# Altium PCB VT18-MODEL-B.PcbDoc (part 2 of 3)
Units mil, origin at the board's own origin, x right, y up, seen from the top; angles counter-clockwise.
Board outline 4724.41 x 4645.67 mil, 4 copper layers (Top Layer, Internal Plane 1, Internal Plane 2, Bottom Layer), stack 30.635 mil thick; 246 components, 149 nets, 926 pads, 600 vias.
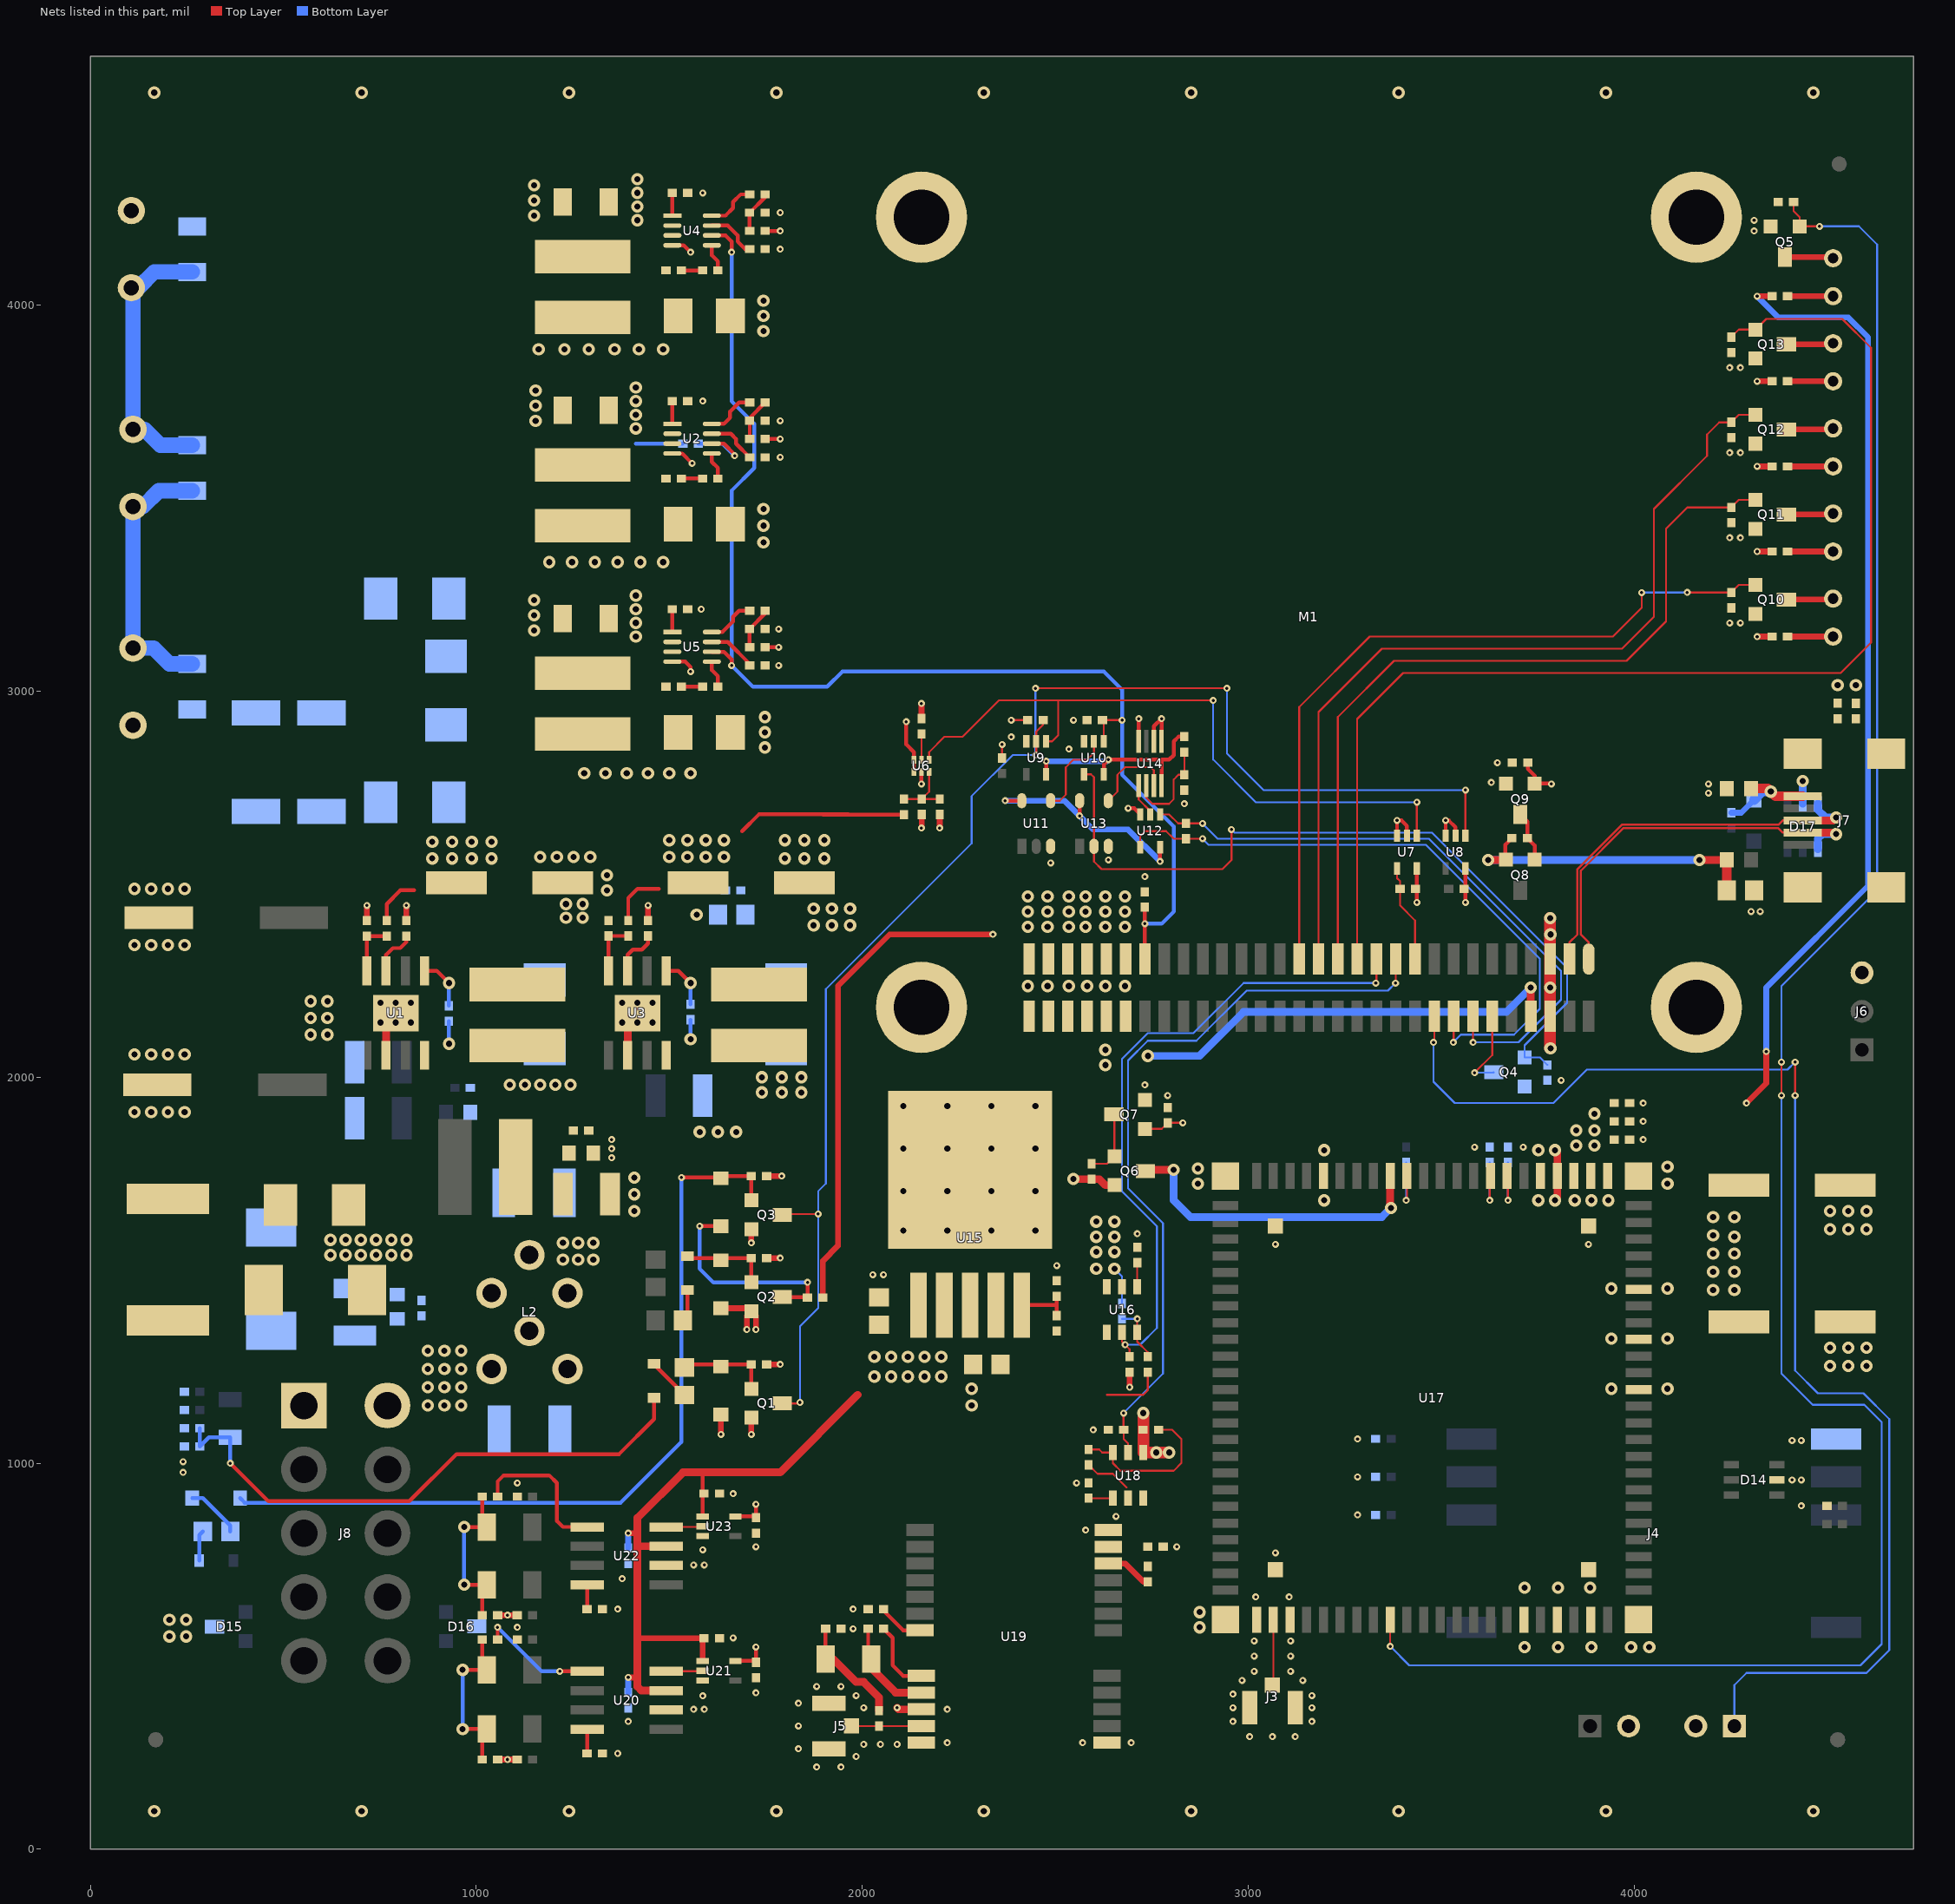
[diagram p4: the nets of this part, all layers, seen from the top]

## Via types
v1: diameter 32, hole 16, Top Layer to Bottom Layer, tented both sides, 365 vias
v2: diameter 18, hole 8, Top Layer to Bottom Layer, tented both sides, 235 vias

## Nets (pads, with @x,y where several pads share a name; then routed paths per layer and width w, separated by ;. In a path a pad name is that pad's centre, name@x,y a point inside that pad or via, vN(x,y) a via of type N, cw(c..) or ccw(c..) an arc to the next point about the centre after c; other vN are vias at no path point) (continued)
CORE-PWR: C16.1 L3.2 M1.57 M1.58 M1.59 M1.60 R11.1 R31.1 R35.1 R36.1 R42.1 U6.1 U6.6 U9.5 U10.5 U11.5 U12.5 U13.5 U14.8 | length 2670.3
  Top Layer w5: R36.1@2362.2,2827.21 v2(2362.2,2862.2) ; v2(2385.83,2925.2) R31.1@2428.69,2925.2
  Top Layer w10: R11.1@1748.47,3653.54 v2(1787.4,3653.54) ; v2(2114.17,2921.26) 2114.17,2862.2 2133.86,2842.52 U6.6@2133.86,2822.83 U6.1@2133.86,2791.34 ; v2(2370.08,2716.54) U11.5@2413.39,2716.54 ; U9.5@2476.38,2785.08 v2(2476.38,2818.9) ; v2(2562.99,2677.17) U13.5@2562.99,2716.54 ; U10.5@2625.98,2785.08 2625.98,2811.02 v2(2637.8,2822.83) 2775.59,2822.83 ; v2(2771.65,2559.06) U12.5@2771.65,2596.1 ; U14.8@2775.59,2755.91 2775.59,2822.83 ; R42.1@2834.65,2882.33 2819.34,2882.33 2807.09,2870.08 2807.09,2834.65 2795.28,2822.83 2775.59,2822.83
  Top Layer w15: R35.1@1898.08,1429.13 1898.08,1524.06 1937.01,1562.99 1937.01,2236.22 2070.87,2370.08 v2(2338.58,2370.08)
  Bottom Layer w15: v2(2370.08,2716.54) 2523.62,2716.54 v2(2562.99,2677.17) 2598.43,2641.73 2688.98,2641.73 v2(2771.65,2559.06) ; v2(2476.38,2818.9) 2633.86,2818.9 v2(2637.8,2822.83)
  other v1: 2429.13,2236.22 2480.31,2236.22 2429.13,2389.76 2480.31,2389.76 2429.13,2429.13 2480.31,2429.13 2429.13,2468.5 2480.31,2468.5 1188.98,3334.65 1248.03,3334.65 1307.09,3334.65 1366.14,3334.65 1425.2,3334.65 1484.25,3334.65
GND: C3.2 C4.2 C6.2 C7.2 C8.2 C9.2 C10.2 C11.2 C13.1 C15.2 C16.2 C18.1 C19.2 C21.1 C22.2 C25.2 C26.1 C27.1 C28.2 C29.1 C30.2 C31.1 C32.1 C34.1 C35.2 C36.2 C37.1 C38.1 C39.2 C40.2 C41.2 C42.2 C43.2 C48.2 C50.1 C51.1 C52.2 C53.2 C54.2 C55.2 C56.2 C57.2 C58.2 C59.2 C60.2 C62.2 C63.2 C64.1 C65.2 C66.2 C67.2 C68.2 C69.2 C70.1 C71.2 C72.2 C73.2 C74.2 C75.2 C76.1 C78.1 D6.1 D8.1 D10.1 D12.1 D14.2 D15.3 D16.3 D17.2 J1.2 J2.2 J3.2 J3.3 J4.4 J5.2 J5.3 J6.3 L2.4 L2.5 L2.6 L10.1 M1.5 M1.6 M1.49 M1.50 M1.51 M1.52 M1.MT1 M1.MT2 M1.MT3 M1.MT4 Q1.3 Q2.3 Q3.3 Q4.3 Q5.3 Q7.3 Q9.3 Q10.3 Q11.3 Q12.3 Q13.3 R2.1 R3.2 R12.2 R13.2 R15.2 R16.2 R21.2 R22.2 R23.2 R28.2 R29.2 R34.2 R39.2 R40.2 R43.2 R46.1 R48.2 R49.1 R50.1 R52.1 R53.2 R54.2 R58.1 R59.1 R62.1 R67.2 R71.2 R73.1 R74.2 R79.1 R80.1 R81.1 R82.1 R83.2 U1.6 U1.9 U2.4 U3.6 U3.9 U4.4 U5.4 U6.2 U7.2 U7.3 U8.2 U8.3 U9.3 U10.3 U11.3 U12.3 U13.3 U14.1 U14.2 U14.4 U15. U15.3 U17.1 U17.14 U17.17 U17.20 U17.26 U17.30 U17.31 U17.44 U17.49 U17.74 U17.75 U17.77 U17.91 U17.93 U17.95 U17.97 U17.98 U17.99 U17.100 U19.10 U19.12 U19.13 U19.24 U20.2 U21.3 U22.2 U23.3 | length 2215.5
  Top Layer w10: U5.4@1507.87,3076.77 1541.34,3076.77 1555.12,3062.99 v2(1555.12,3051.18) ; U2.4@1507.87,3616.14 1533.46,3616.14 v2(1559.06,3590.55) ; U4.4@1507.87,4155.51 1537.4,4155.51 v2(1555.12,4137.8) ; v2(2153.54,2759.84) U6.2@2153.54,2791.34 ; v2(2688.98,2696.85) 2704.71,2696.85 U12.3@2720.46,2681.1 ; U14.4@2716.54,2870.08 v2(2716.54,2929.13) ; U14.2@2755.91,2870.08 2755.91,2909.45 v2(2775.59,2929.13) U14.1@2775.59,2870.08 ; U7.3@3385.81,2625.98 v2(3385.83,2665.35) 3397.65,2665.34 3411.41,2651.58 U7.2@3411.41,2625.98 ; U8.3@3511.8,2625.98 v2(3511.8,2665.34) 3519.7,2665.34 3537.39,2647.65 U8.2@3537.39,2625.98
  Top Layer w15: R3.2@716.54,2405.7 v2(716.54,2444.88) ; R13.2@818.9,2405.7 v2(818.9,2444.88) ; C69.2@1055.31,232.28 C64.1@1105.86,232.28 ; C75.2@1055.31,606.3 C70.1@1105.86,606.3 ; R21.2@1444.88,2406.14 v2(1444.88,2444.88) ; v2(1633.86,1074.8) D10.1@1633.86,1125.98 ; D12.1@1633.86,1401.57 Q2.3@1704.53,1401.57 ; v2(1700.79,1346.46) 1700.79,1381.69 Q2.3@1712.6,1393.5 1724.41,1381.69 v2(1724.41,1346.46) ; v2(1712.6,1074.8) Q1.3@1712.6,1117.91 ; v2(1712.6,1570.87) Q3.3@1712.6,1606.1 ; R34.2@1752.16,1255.91 v2(1787.4,1255.91) ; R39.2@1752.16,1531.5 v2(1787.4,1531.5) ; R83.2@1752.16,1744.09 v2(1791.34,1744.09) ; v2(2153.54,2645.67) 2154.39,2646.51 R29.2@2154.39,2680.91 ; C36.2@2153.54,2929.32 v2(2153.54,2968.5) ; v2(2200.79,2645.67) C39.2@2200.79,2680.91 ; v2(2692.91,1196.85) R50.1@2692.91,1235.78
  Top Layer w20: U1.6@766.14,2056.69 766.14,2140.94 U1.9@791.34,2166.14 ; U3.6@1392.13,2056.69 U3.9@1392.13,2140.94 ; v2(2090.55,366.14) 2094.49,362.2 U19.10@2153.54,362.2 ; v1(3751.97,1681.1) v1@3755.91,1681.1 ; v1(3751.97,1811.02) v1@3755.91,1811.02 ; v1(3795.28,1681.1) 3801.18,1687.01 U17.30@3801.18,1744.09 3801.18,1805.12 v1(3795.28,1811.02)
  Top Layer w30: v1(3782.48,2412.4) M1.5@3782.48,2306.1 v1(3782.48,2232.28) M1.6@3782.48,2158.47 3782.48,2075.79 v1(3783.46,2074.8)
  Bottom Layer w20: D17.2@4437.01,2708.66 v1(4437.01,2767.72)
  other v1: 165.35,98.43 702.76,98.43 1240.16,98.43 1777.56,98.43 2314.96,98.43 2852.36,98.43 3389.76,98.43 3927.16,98.43 4464.57,98.43 3716.54,523.62 3803.15,523.62 3889.76,523.62 3992.13,523.62 4039.37,523.62 204.72,551.18 248.03,551.18 2874.02,574.8 204.72,594.49 248.03,594.49 2874.02,614.17 3716.54,677.17 3803.15,677.17 3885.83,677.17 2283.46,1149.61 2283.46,1192.91 3940.94,1192.91 4086.61,1192.91 4507.87,1251.97 4555.12,1251.97 4602.36,1251.97 4507.87,1299.21 4555.12,1299.21 4602.36,1299.21 3940.94,1322.83 4086.61,1322.83 3940.94,1452.76 4086.61,1452.76 2106.3,1602.36 2220.47,1602.36 2334.65,1602.36 2448.82,1602.36 4507.87,1606.3 4555.12,1606.3 4602.36,1606.3 1409.45,1653.54 4507.87,1653.54 4555.12,1653.54 4602.36,1653.54 3196.85,1681.1 1409.45,1696.85 2106.3,1704.72 2220.47,1704.72 2334.65,1704.72 2448.82,1704.72 2870.08,1724.41 4086.61,1724.41 1409.45,1740.16 2870.08,1763.78 4086.61,1767.72 3196.85,1811.02 2106.3,1814.96 2220.47,1814.96 2334.65,1814.96 2448.82,1814.96 1578.74,1858.27 1625.98,1858.27 1673.23,1858.27 114.17,1909.45 157.48,1909.45 200.79,1909.45 244.09,1909.45 2106.3,1925.2 2220.47,1925.2 2334.65,1925.2 2448.82,1925.2 2629.92,2031.5 114.17,2059.06 157.48,2059.06 200.79,2059.06 244.09,2059.06 2629.92,2070.87 570.87,2110.24 614.17,2110.24 751.97,2141.73 791.34,2141.73 830.71,2141.73 1377.95,2141.73 1417.32,2141.73 1456.69,2141.73 570.87,2153.54 614.17,2153.54 751.97,2192.91 791.34,2192.91 830.71,2192.91 1377.95,2192.91 1417.32,2192.91 1456.69,2192.91 570.87,2196.85 614.17,2196.85 2629.92,2236.22 2681.1,2236.22 114.17,2342.52 157.48,2342.52 200.79,2342.52 244.09,2342.52 3783.46,2370.08 2629.92,2389.76 2681.1,2389.76 1874.02,2393.7 1921.26,2393.7 1968.5,2393.7 1232.28,2413.39 1275.59,2413.39 2629.92,2429.13 2681.1,2429.13 1874.02,2437.01 1921.26,2437.01 1968.5,2437.01 1232.28,2448.82 1275.59,2448.82 2629.92,2468.5 2681.1,2468.5 1338.58,2484.25 114.17,2488.19 157.48,2488.19 200.79,2488.19 244.09,2488.19 1338.58,2523.62 1799.21,2566.93 1850.39,2566.93 1901.57,2566.93 1165.35,2570.87 1208.66,2570.87 1251.97,2570.87 1295.28,2570.87 1799.21,2614.17 1850.39,2614.17 1901.57,2614.17 1748.03,2854.33 1748.03,2893.7 1748.03,2933.07 4527.56,3015.75 4574.8,3015.75 1149.61,3157.48 1149.61,3196.85 1149.61,3236.22 1744.09,3385.83 1744.09,3429.13 1744.09,3472.44 1153.54,3700.79 1153.54,3740.16 1153.54,3779.53 1744.09,3933.07 1744.09,3972.44 1744.09,4011.81 1149.61,4232.28 1149.61,4271.65 1149.61,4311.02 165.35,4551.18 702.76,4551.18 1240.16,4551.18 1777.56,4551.18 2314.96,4551.18 2852.36,4551.18 3389.76,4551.18 3927.16,4551.18 4464.57,4551.18
  other v2: 1881.89,212.6 1944.88,212.6 1080.58,232.28 1984.25,240.16 1366.14,248.03 1834.65,259.84 2003.94,271.65 2047.24,271.65 2090.55,271.65 2220.47,275.59 2570.87,275.59 2696.85,275.59 3003.94,291.34 3062.99,291.34 3122.05,291.34 1834.65,318.9 1393.7,330.71 2960.63,330.71 3165.35,330.71 1562.99,362.2 1590.55,362.2 2220.47,362.2 2003.94,366.14 2960.63,366.14 3165.35,366.14 1834.65,377.95 1586.61,397.2 1984.25,397.64 3165.35,397.64 2960.63,401.57 1724.41,405.07 1881.89,421.26 1944.88,421.26 2984.25,437.01 3141.73,437.01 3015.75,460.63 3110.24,460.63 3015.75,500 3110.24,500 3015.75,539.37 3110.24,539.37 1665.35,547.24 1976.38,570.87 1106.3,574.8 1080.58,606.3 1366.14,622.05 1976.38,622.05 3019.68,653.54 3106.3,653.54 1377.95,700.79 1562.99,736.22 1590.55,736.22 3070.87,767.72 1586.61,775.59 1724.41,783.46 2814.96,783.46 2578.74,826.77 2657.48,862.2 3283.46,866.14 4433.07,889.76 1665.35,921.26 1106.3,948.82 2555.12,948.82 4409.45,956.69 4433.07,956.69 3283.46,964.57 240.16,976.38 240.16,1003.94 4409.45,1059.06 4433.07,1059.06 3283.46,1062.99 2598.43,1086.61 2027.56,1488.19 2055.12,1488.19 2503.94,1511.81 3070.87,1566.93 3881.89,1566.93 2712.6,1594.49 1350.39,1791.34 1350.39,1814.96 3586.61,1818.9 3712.6,1818.9 1350.39,1838.58 4023.62,1838.58 4023.62,1885.83 4023.62,1933.07 2791.34,1952.76 2732.28,1980.31 3811.02,1992.13 4303.15,2429.13 4326.77,2429.13 2732.28,2519.69 2488.19,2555.12 2637.8,2562.99 2834.65,2708.66 4192.91,2736.22 4192.91,2759.84 3629.92,2763.78 3645.67,2814.96 2535.43,2850.39 2385.83,2881.89 2547.24,2925.2 1783.46,3066.93 1783.46,3161.42 4248.03,3177.17 4275.59,3177.17 1582.68,3212.6 4248.03,3397.64 4275.59,3397.64 1787.4,3606.3 4248.03,3618.11 4275.59,3618.11 1787.4,3700.79 1586.61,3751.97 4248.03,3838.58 4275.59,3838.58 1787.4,4145.67 4311.02,4192.91 4311.02,4220.47 1787.4,4240.16 1586.61,4291.34
GPS-ANT: J5.1 L8.2 U19.11 | length 181.1
  Top Layer w4.7: J5.1@1972.44,318.9 U19.11@2153.54,318.9
GPS-PWR: C61.1 C63.1 R63.2 U18.2 U18.3 U19.23 | length 123.3
  Top Layer w5: C61.1@2586.61,995.62 2609.8,972.44 2649.61,972.44 2685.04,937.01
  Top Layer w15: U19.23@2637.8,783.46 U19.23@2638.24,783.02
GPS-PWREN: M1.21 R59.2 U18.5 | length 1938.9
  Top Layer w5: v2(2677.17,1129.92) 2677.17,1086.8 R59.2@2677.35,1086.61 2677.35,1062.8 2688.98,1051.18 U18.5@2688.98,1027.56 ; v2(3381.89,2244.09) 3382.48,2244.68 M1.21@3382.48,2306.1
  Bottom Layer w5: v2(2677.17,1129.92) 2779.53,1232.28 2779.53,1622.05 2688.98,1712.6 2688.98,2043.31 2740.16,2094.49 2866.14,2094.49 2996.06,2224.41 3362.2,2224.41 v2(3381.89,2244.09)
LED1: M1.31 Q10.2 R79.2 | length 1989.6
  Top Layer w5: M1.31@3132.48,2306.1 3132.48,2959.25 3314.96,3141.73 3944.88,3141.73 4019.68,3216.54 v2(4019.68,3255.91) ; v2(4137.8,3256.09) R79.2@4251.97,3256.09 4271.46,3275.59 Q10.2@4314.96,3275.59
  Bottom Layer w5: v2@4019.68,3256.09 v2(4137.8,3256.09)
LED2: M1.27 Q11.2 R80.2 | length 2083.3
  Top Layer w5: M1.27@3232.48,2306.1 3232.48,2933.07 3378.15,3078.74 3980.31,3078.74 4082.68,3181.1 4082.68,3421.26 4137.8,3476.38 4251.78,3476.38 R80.2@4251.97,3476.57 4271.46,3496.06 Q11.2@4314.96,3496.06
LED3: M1.29 Q12.2 R81.2 | length 2287.7
  Top Layer w5: M1.29@3182.48,2306.1 3182.48,2946.26 3346.46,3110.24 3968.5,3110.24 4051.18,3192.91 4051.18,3472.44 4188.98,3610.24 4188.98,3665.35 4220.47,3696.85 4251.78,3696.85 R81.2@4251.97,3697.04 4271.46,3716.54 Q12.2@4314.96,3716.54
LED4: M1.25 Q13.2 R82.2 | length 3212.1
  Top Layer w5: M1.25@3282.48,2306.1 3282.48,2928.15 3401.57,3047.24 4535.43,3047.24 4614.17,3125.98 4614.17,3889.76 4539.37,3964.57 4342.52,3964.57 Q13.2@4314.96,3937.01 4271.46,3937.01 R82.2@4251.97,3917.51
M3V8: C49.1 C52.1 C53.1 C54.1 C55.1 C56.1 Q7.2 R44.1 R52.2 U16.2 U16.3 U17.27 U17.28 U17.29 | length 2688.3
  Top Layer w5: Q7.2@2732.28,1866.14 2775.78,1866.14 R52.2@2791.34,1881.7 2791.53,1881.89 v2(2830.71,1881.89)
  Top Layer w15: v2(4291.34,1933.07) 4342.52,1984.25 v2(4342.52,2066.93) ; v2(4318.9,4023.62) R44.1@4357.83,4023.62
  Bottom Layer w5: v1(2653.54,1503.94) 2673.23,1484.25 C49.1@2673.23,1413.83
  Bottom Layer w15: v2(4318.9,4023.62) 4374.02,3968.5 4555.12,3968.5 4606.3,3917.32 4606.3,2496.06 4342.52,2232.28 v2(4342.52,2066.93)
  other v1: 4204.72,1448.82 4259.84,1448.82 4204.72,1496.06 4259.84,1496.06 2606.3,1503.94 4204.72,1543.31 4259.84,1543.31 2606.3,1547.24 2653.54,1547.24 2606.3,1586.61 2653.54,1586.61 4259.84,1586.61 4204.72,1590.55 2606.3,1625.98 2653.54,1625.98 4204.72,1637.8 4259.84,1637.8 3846.46,1681.1 3889.76,1681.1 3933.07,1681.1 3850.39,1822.83 3897.64,1822.83 3850.39,1862.2 3897.64,1862.2 3897.64,1905.51
MAIN-PWR: C13.2 C26.2 C34.2 D4.2 D7.2 R7.2 U2.2 U4.2 U5.2 | length 121.9
  Bottom Layer w10: 1413.39,3641.73 R7.2@1535.24,3641.73
  other v1: 1413.39,3141.73 1413.39,3177.17 1413.39,3212.6 1413.39,3248.03 1413.39,3681.1 1413.39,3716.54 1413.39,3751.97 1413.39,3787.4 1417.32,4220.47 1417.32,4255.91 1417.32,4291.34 1417.32,4326.77
MODEM-ANT: J3.1 U17.76 | length 170.1
  Top Layer w4.7: J3.1@3062.99,425.2 3064.96,427.17 U17.76@3064.96,594.49
MODEM-PWR: M1.23 R50.2 U16.5 | length 1707.7
  Top Layer w5: U16.5@2673.23,1338.58 2673.23,1314.96 v2(2681.1,1307.09) 2692.91,1295.28 R50.2@2692.91,1275.78 ; v2(3330.71,2244.09) 3332.48,2245.87 M1.23@3332.48,2306.1
  Bottom Layer w5: v2(2681.1,1307.09) 2720.47,1307.09 2763.78,1350.39 2763.78,1614.17 2673.23,1704.72 2673.23,2047.24 2740.16,2114.17 2858.27,2114.17 2988.19,2244.09 v2(3330.71,2244.09)
MODEM-USB-VBUS: Q6.3 U17.40 | length 827.6
  Top Layer w20: Q6.3@2733.54,1757.28 2736.11,1759.84 v1(2807.09,1759.84) ; U17.40@3368.11,1744.09 3368.11,1663.39 v1(3370.08,1661.42)
  Bottom Layer w20: v1(2807.09,1759.84) 2807.09,1681.1 2850.39,1637.8 3346.46,1637.8 v1(3370.08,1661.42)
MP-LOST: U6.4 U7.1 U9.1 | length 1753.3
  Top Layer w5: U6.4@2173.23,2822.83 2173.23,2842.52 2212.6,2881.89 2259.84,2881.89 2354.33,2976.38 2507.87,2976.38 ; U9.1@2476.38,2870.08 2492.13,2870.08 2507.87,2885.83 2507.87,2976.38 ; v2(2909.45,2976.38) 2507.87,2976.38 ; U7.1@3437.01,2625.98 v2(3437.01,2712.6)
  Bottom Layer w5: v2(2909.45,2976.38) 2909.45,2822.83 3019.69,2712.6 v2(3437.01,2712.6)
MR: J2.1 M1.18 | length 3414.3
  Top Layer w5: v2(3480.31,2090.55) 3482.48,2092.72 M1.18@3482.48,2158.47 ; v2(4417.32,1952.76) v2(4417.32,2039.37)
  Bottom Layer w5: v2(3480.31,2090.55) 3480.31,1988.19 3535.43,1933.07 3791.34,1933.07 3877.95,2019.69 4397.64,2019.69 v2(4417.32,2039.37) ; J2.1@4259.84,318.9 4259.84,425.2 4291.34,456.69 4602.36,456.69 4661.42,515.75 4661.42,1114.17 4594.49,1181.1 4476.38,1181.1 4417.32,1240.16 v2(4417.32,1952.76)
MX6-ONOFF: M1.12 Q4.1 | length 216.1
  Top Layer w5: v2(3586.61,2011.81) 3632.48,2057.68 M1.12@3632.48,2158.47
  Bottom Layer w5: v2(3586.61,2011.81) 3635.17,2011.81 Q4.1@3636.54,2013.18
NET-LIGHT: Q5.2 R49.2 U17.83 | length 5590.3
  Top Layer w5: v2(3368.11,525.59) U17.83@3368.11,594.49 ; v2(4381.89,1952.76) v2(4381.89,2039.37) ; R49.2@4413.57,4267.72 4413.57,4243.91 4429.13,4228.35 Q5.2@4429.13,4204.72 v2(4480.31,4204.72)
  Bottom Layer w5: v2(3368.11,525.59) 3417.32,476.38 4586.61,476.38 4641.73,531.5 4641.73,1106.3 4596.61,1151.42 4462.76,1151.42 4381.89,1232.28 v2(4381.89,1952.76) ; v2(4381.89,2039.37) 4381.89,2236.22 4629.92,2484.25 4629.92,4157.48 4582.68,4204.72 v2(4480.31,4204.72)
NetC1_1: C1.1 C2.1 C5.1 D1.2 D2.2 D3.2 L2.1 R1.2
  other v1: 622.05,1539.37 661.42,1539.37 700.79,1539.37 740.16,1539.37 779.53,1539.37 818.9,1539.37 622.05,1578.74 661.42,1578.74 700.79,1578.74 740.16,1578.74 779.53,1578.74 818.9,1578.74
NetC4_1: C4.1 C8.1 C9.1 L1.1 L2.3 R1.1
  other v1: 1224.41,1527.56 1263.78,1527.56 1303.15,1527.56 1224.41,1570.87 1263.78,1570.87 1303.15,1570.87
NetC12_1: C12.1 L3.1 U2.3
NetC12_2: C12.2 R5.1 | length 54.7
  Top Layer w10: C12.2@1531.5,3551.18 R5.1@1586.17,3551.18
NetC14_1: C14.1 D6.2 L4.1 U1.8 | length 62.6
  Top Layer w10: v1@929.13,2082.68 v1(929.13,2086.61)
  Bottom Layer w10: v1(929.13,2086.61) C14.1@929.13,2145.23
  other v1: 1086.61,1980.31 1125.98,1980.31 1165.35,1980.31 1204.72,1980.31 1244.09,1980.31
NetC14_2: C14.2 U1.1 | length 134.9
  Top Layer w10: U1.1@866.14,2275.59 897.64,2275.59 v1(929.13,2244.09)
  Bottom Layer w10: C14.2@929.13,2185.23 v1(929.13,2244.09)
NetC17_1: C17.1 D4.1 R6.2 R8.2 R9.1
NetC17_2: C17.2 C20.1 R9.2 R14.1 | length 707.9
  Bottom Layer w40: R9.2@263.78,3070.87 204.72,3070.87 163.78,3111.81 C17.2@110.24,3111.81 C20.1@110.24,3478.74 136.22,3478.74 177.17,3519.69 R14.1@263.78,3519.69
NetC18_2: C18.2 U2.1 | length 59.1
  Top Layer w10: C18.2@1507.69,3751.97 1507.87,3751.78 U2.1@1507.87,3692.91
NetC20_2: C20.2 C22.1 R14.2 R15.1 | length 713.5
  Bottom Layer w40: R14.2@263.78,3637.8 181.1,3637.8 140.16,3678.74 C20.2@110.24,3678.74 110.24,4041.73 C22.1@106.3,4045.67 124.41,4045.67 165.35,4086.61 R15.1@263.78,4086.61
NetC21_2: C21.2 U2.7 | length 130.5
  Top Layer w10: U2.7@1610.24,3667.32 1659.45,3667.32 1673.23,3653.54 1673.23,3641.54 C21.2@1708.47,3606.3
NetC23_1: C23.1 L5.1 U4.3
NetC23_2: C23.2 R18.1 | length 54.7
  Top Layer w10: C23.2@1531.5,4090.55 R18.1@1586.17,4090.55
NetC24_1: C24.1 D8.2 L6.1 U3.8 | length 50.7
  Bottom Layer w10: v1(1555.12,2098.43) C24.1@1555.12,2149.17
  other v1: 1740.16,1960.63 1791.34,1960.63 1842.52,1960.63 1740.16,2000 1791.34,2000 1842.52,2000
NetC24_2: C24.2 U3.1 | length 131
  Top Layer w10: U3.1@1492.13,2275.59 1523.62,2275.59 v1(1555.12,2244.09)
  Bottom Layer w10: C24.2@1555.12,2189.17 v1(1555.12,2244.09)
NetC31_2: C31.2 U4.1 | length 59.1
  Top Layer w10: C31.2@1507.69,4291.34 1507.87,4291.15 U4.1@1507.87,4232.28
NetC32_2: C32.2 U4.7 | length 132.7
  Top Layer w10: U4.7@1610.24,4206.69 1651.57,4206.69 1677.17,4181.1 1677.17,4165.35 1696.85,4145.67 C32.2@1708.47,4145.67
NetC33_1: C33.1 L7.1 U5.3
NetC33_2: C33.2 R24.1 | length 54.7
  Top Layer w10: C33.2@1531.5,3011.81 R24.1@1586.17,3011.81
NetC36_1: C36.1 U6.5 | length 66.5
  Top Layer w5: U6.5@2153.54,2822.83 C36.1@2153.54,2889.32
NetC37_2: C37.2 U5.1 | length 59.1
  Top Layer w10: C37.2@1507.69,3212.6 1507.87,3212.41 U5.1@1507.87,3153.54
NetC38_2: C38.2 U5.7 | length 125.9
  Top Layer w10: U5.7@1610.24,3127.95 1651.57,3127.95 1708.47,3071.05 C38.2@1708.47,3066.93
NetC39_1: C39.1 R27.2 R29.1 U6.3 | length 171.1
  Top Layer w5: R27.2@2107.98,2720.66 2200.54,2720.66 C39.1@2200.79,2720.91 ; R29.1@2154.39,2720.91 2173.23,2739.76 U6.3@2173.23,2791.34
NetC40_1: C40.1 C41.1 D9.1 L11.1 | length 1485.1
  Top Layer w10: v2(362.2,1000) 460.63,901.57 826.77,901.57 948.82,1023.62 1370.08,1023.62 1460.63,1114.17 D9.1@1460.63,1169.29
  Bottom Layer w10: C41.1@283.46,1090.55 C40.1@283.46,1043.31 307.09,1066.93 L11.1@362.2,1066.93 v2(362.2,1000)
NetC48_1: C48.1 R42.2 U14.6 | length 256
  Top Layer w5: U14.6@2736.22,2755.91 2736.22,2724.41 2751.97,2708.66 2795.28,2708.66 2807.09,2720.47 2807.09,2771.65 2819.34,2783.91 C48.1@2834.65,2783.91 R42.2@2834.65,2842.33
NetC49_2: C49.2 R45.2 U16.6 | length 149.1
  Top Layer w5: v2(2712.6,1374.02) U16.6@2712.6,1338.58 2712.6,1314.96 2740.16,1287.4 R45.2@2740.16,1275.78
  Bottom Layer w5: C49.2@2673.23,1373.83 2673.42,1374.02 v2(2712.6,1374.02)
NetC61_2: C61.2 R57.2 U18.6 | length 419
  Top Layer w5: C61.2@2586.61,1035.62 2613.98,1035.62 2622.05,1027.56 U18.6@2649.61,1027.56 2649.61,1000 2669.29,980.31 2807.09,980.31 2826.77,1000 2826.77,1062.99 2803.15,1086.61 R57.2@2767.91,1086.61
NetC62_1: C62.1 L8.1 R60.1 | length 292.5
  Top Layer w10: C62.1@1905.07,570.87 1905.07,492.57 R60.1@1905.51,492.13
  Top Layer w20: R60.1@1905.51,492.13 1925.2,492.13 1984.25,433.07 2003.94,433.07 2043.31,393.7 L8.1@2043.31,358.71
NetC69_1: C69.1 R64.2 R65.1 R66.1 | length 412.5
  Top Layer w10: v1(964.57,311.02) R64.2@1027.56,311.02 ; v1(964.57,464.57) R66.1@1027.56,464.57 ; C69.1@1015.31,232.28 R64.2@1015.31,298.77 ; R66.1@1015.31,476.82 R65.1@1015.31,543.31
  Bottom Layer w10: v1(964.57,311.02) v1(964.57,464.57)
NetC75_1: C75.1 R68.2 R69.1 R70.1 | length 400.7
  Top Layer w10: v1(968.5,685.04) R68.2@1027.56,685.04 ; v1(968.5,834.65) R70.1@1027.56,834.65 ; C75.1@1015.31,606.3 R68.2@1015.31,672.79 ; R70.1@1015.31,846.9 R69.1@1015.31,913.39
  Bottom Layer w10: v1(968.5,685.04) v1(968.5,834.65)
NetC77_1: C77.1 D18.1 J7.5 L10.2 | length 267
  Top Layer w25: L10.2@4303.15,2748.03 4346.46,2748.03 v1(4354.33,2740.16) 4366.14,2728.35 J7.5@4437.01,2728.35
  Bottom Layer w15: C77.1@4251.97,2685.48 4278,2685.48 D18.1@4311.02,2718.5
  Bottom Layer w25: D18.1@4311.02,2718.5 4332.68,2740.16 v1(4354.33,2740.16)
NetD1_1: D1.1 D2.1 F1.1
NetD5_2: D5.2 R6.1 R8.1
NetD9_2: D9.2 R32.2 | length 112.5
  Top Layer w10: D9.2@1460.63,1257.09 1460.63,1255.91 R32.2@1539.37,1177.17
NetD10_2: D10.2 Q1.2 R32.1 R34.1 | length 239.2
  Top Layer w10: R32.1@1539.37,1248.03 1547.24,1255.91 R34.1@1712.16,1255.91 1712.6,1255.46 Q1.2@1712.6,1192.91
NetD11_1: D11.1 R38.2 | length 66.9
  Top Layer w10: R38.2@1547.24,1381.89 D11.1@1547.24,1448.82
NetD11_2: D11.2 D12.2 Q2.2 R39.1 | length 230.2
  Top Layer w10: D11.2@1547.24,1536.61 1552.36,1531.5 R39.1@1712.16,1531.5 1712.6,1531.06 Q2.2@1712.6,1468.5
NetD13_1: D13.1 R44.2 | length 117.9
  Top Layer w15: R44.2@4397.83,4023.62 D13.1@4515.75,4023.62
NetD13_2: D13.2 Q5.1 | length 125.7
  Top Layer w15: Q5.1@4391.13,4124.72 4513.07,4124.72 D13.2@4515.75,4122.05
NetD19_1: D19.1 R75.2 | length 117.9
  Top Layer w15: R75.2@4397.83,3141.73 D19.1@4515.75,3141.73
NetD19_2: D19.2 Q10.1 | length 121.9
  Top Layer w15: Q10.1@4394.96,3237.59 4513.18,3237.59 D19.2@4515.75,3240.16
NetD20_1: D20.1 R76.2 | length 117.9
  Top Layer w15: R76.2@4397.83,3362.2 D20.1@4515.75,3362.2
NetD20_2: D20.2 Q11.1 | length 121.9
  Top Layer w15: Q11.1@4394.96,3458.06 4513.18,3458.06 D20.2@4515.75,3460.63
NetD21_1: D21.1 R77.2 | length 117.9
  Top Layer w15: R77.2@4397.83,3582.68 D21.1@4515.75,3582.68
NetD21_2: D21.2 Q12.1 | length 121.9
  Top Layer w15: Q12.1@4394.96,3678.54 4513.18,3678.54 D21.2@4515.75,3681.1
NetD22_1: D22.1 R78.2 | length 117.9
  Top Layer w15: R78.2@4397.83,3803.15 D22.1@4515.75,3803.15
NetD22_2: D22.2 Q13.1 | length 121.9
  Top Layer w15: Q13.1@4394.96,3899.01 4513.18,3899.01 D22.2@4515.75,3901.57
NetD23_1: D23.1 Q2.1 R35.2 | length 565.1
  Top Layer w10: v2(1578.74,1614.17) D23.1@1633.86,1614.17 ; Q2.1@1792.6,1430.5 1856.71,1430.5 R35.2@1858.08,1429.13 1858.27,1429.32 v2(1858.27,1468.5)
  Bottom Layer w10: v2(1578.74,1614.17) 1578.74,1503.94 1614.17,1468.5 v2(1858.27,1468.5)
NetD23_2: D23.2 D24.2 Q3.2 R83.1 | length 2146
  Top Layer w10: v2(1531.5,1740.16) 1631.89,1740.16 D23.2@1633.86,1738.19 1639.76,1744.09 R83.1@1712.16,1744.09 1712.6,1743.65 Q3.2@1712.6,1681.1
  Bottom Layer w10: D24.2@387.8,909.45 399.61,897.64 1374.02,897.64 1531.5,1055.12 v2(1531.5,1740.16)
NetD24_1: D24.1 R84.1 | length 143.5
  Bottom Layer w10: D24.1@263.78,909.45 291.34,909.45 362.2,838.58 R84.1@362.2,822.83
NetD25_2: D25.2 R84.2 | length 78.6
  Bottom Layer w10: D25.2@282.28,748.03 282.28,813.78 R84.2@291.34,822.83
NetQ1_1: Q1.1 Q3.1 R31.2 U8.1 U9.2 | length 3818.6
  Top Layer w5: Q1.1@1792.6,1154.91 1836.02,1154.91 v2(1838.58,1157.48) ; Q3.1@1792.6,1643.1 1795.17,1645.67 v2(1885.83,1645.67) ; v2(2448.82,2834.65) 2450.78,2836.61 U9.2@2450.78,2870.08 2450.78,2895.66 2468.69,2913.57 R31.2@2468.69,2925.2 ; v2(2448.82,3007.87) v2(2944.88,3007.87) ; U8.1@3562.99,2625.98 v2(3562.99,2744.09)
  Bottom Layer w5: v2(1838.58,1157.48) 1838.58,1354.33 1885.83,1401.57 v2(1885.83,1645.67) 1885.83,1704.72 1905.51,1724.41 1905.51,2228.35 2283.46,2606.3 2283.46,2728.35 2389.76,2834.65 v2(2448.82,2834.65) v2(2448.82,3007.87) ; v2(2944.88,3007.87) 2944.88,2838.58 3039.37,2744.09 v2(3562.99,2744.09)
NetQ4_2: Q4.2 R43.1 U10.4 U13.2 | length 2063.7
  Top Layer w5: U10.4@2574.79,2785.08 2592.87,2785.08 2600.39,2777.56 U13.2@2600.39,2598.43 2600.39,2559.06 2620.08,2539.37 2933.07,2539.37 2956.69,2562.99 v2(2956.69,2641.73)
  Bottom Layer w5: v2(2956.69,2641.73) 2964.57,2633.86 3476.38,2633.86 3826.77,2283.46 3826.77,2192.91 3716.54,2082.68 Q4.2@3716.54,2051.18 3756.35,2051.18 R43.1@3775.59,2031.94
NetQ6_1: Q6.1 Q7.1 R51.1 | length 176.4
  Top Layer w5: R51.1@2594.49,1776.03 2634.3,1776.03 Q6.1@2653.54,1795.28 2653.54,1902.88 Q7.1@2652.28,1904.14
NetQ8_1: Q8.1 Q9.1 R72.1 | length 132.6
  Top Layer w10: Q9.1@3704.72,2681.1 3723.48,2662.35 R72.1@3723.48,2619.37 3742.72,2600.13 Q8.1@3742.72,2564.25
NetR3_1: R3.1 R4.1 U1.4 | length 141.5
  Top Layer w10: U1.4@716.14,2275.59 716.14,2365.31 R3.1@716.54,2365.7 R4.1@767.72,2365.7
NetR5_2: R5.2 U2.5 | length 71.6
  Top Layer w10: U2.5@1610.24,3616.14 1610.24,3594.49 1626.17,3578.55 R5.2@1626.17,3551.18
NetR7_1: R7.1 U2.6 | length 181.5
  Top Layer w10: U2.6@1610.24,3641.73 1641.73,3641.73 1669.29,3614.17 v2(1669.29,3610.24)
  Bottom Layer w10: R7.1@1575.24,3641.73 1637.8,3641.73 v2(1669.29,3610.24)
NetR10_1: R10.1 R11.2 R12.1 | length 111.3
  Top Layer w10: R11.2@1708.47,3653.54 1708.47,3700.54 R12.1@1708.22,3700.79 1708.22,3707.78 R10.1@1748.47,3748.03
NetR10_2: R10.2 U2.8 | length 130.3
  Top Layer w10: U2.8@1610.24,3692.91 1641.73,3692.91 1657.48,3708.66 1657.48,3724.41 1681.1,3748.03 R10.2@1708.47,3748.03
NetR13_1: R13.1 U1.3 | length 123.5
  Top Layer w10: U1.3@766.14,2275.59 766.14,2317.32 783.46,2334.65 803.15,2334.65 818.9,2350.39 R13.1@818.9,2365.7
NetR16_1: R16.1 R17.1 U3.4 | length 141.9
  Top Layer w10: U3.4@1342.13,2275.59 1342.13,2365.75 R16.1@1342.52,2366.14 R17.1@1393.7,2366.14
NetR18_2: R18.2 U4.5 | length 71.6
  Top Layer w10: U4.5@1610.24,4155.51 1610.24,4129.92 1626.17,4113.98 R18.2@1626.17,4090.55
NetR19_1: R19.1 R20.2 R22.1 | length 111.3
  Top Layer w10: R20.2@1708.47,4192.91 1708.22,4193.17 R22.1@1708.22,4240.16 1748.47,4280.41 R19.1@1748.47,4287.4
NetR19_2: R19.2 U4.8 | length 130.3
  Top Layer w10: U4.8@1610.24,4232.28 1645.67,4232.28 1665.35,4251.97 1665.35,4267.72 1685.04,4287.4 R19.2@1708.47,4287.4
NetR21_1: R21.1 U3.3 | length 126.2
  Top Layer w10: U3.3@1392.13,2275.59 1392.13,2317.32 1405.51,2330.71 1429.13,2330.71 1444.88,2346.46 R21.1@1444.88,2366.14
NetR24_2: R24.2 U5.5 | length 71.6
  Top Layer w10: U5.5@1610.24,3076.77 1610.24,3055.12 1626.17,3039.18 R24.2@1626.17,3011.81
NetR25_1: R25.1 R26.2 R28.1 | length 111.3
  Top Layer w10: R26.2@1708.47,3114.17 1708.22,3114.43 R28.1@1708.22,3161.42 1748.47,3201.67 R25.1@1748.47,3208.66
NetR25_2: R25.2 U5.8 | length 128
  Top Layer w10: U5.8@1610.24,3153.54 1637.8,3153.54 1665.35,3181.1 1665.35,3192.91 1681.1,3208.66 R25.2@1708.47,3208.66
NetR46_2: R46.2 U16.1 | length 62.8
  Top Layer w5: U16.1@2712.6,1456.69 R46.2@2712.6,1519.5
NetR47_1: R47.1 R48.1 U15.5 | length 141.7
  Top Layer w10: U15.5@2413.39,1409.45 2501.97,1409.45 2503.94,1407.48 ; R47.1@2503.94,1382.33 2503.94,1407.48 ; R48.1@2503.94,1432.63 2503.94,1407.48
NetR53_1: R53.1 U17.33 | length 161.8
  Top Layer w5: U17.33@3671.26,1744.09 3673.23,1742.13 v2(3673.23,1681.1)
  Bottom Layer w5: v2(3673.23,1681.1) R53.1@3673.23,1779.09
NetR54_1: R54.1 U17.34 | length 159
  Top Layer w5: v2(3625.98,1681.1) U17.34@3625.98,1742.13
  Bottom Layer w5: v2(3625.98,1681.1) R54.1@3625.98,1779.09
NetR55_1: R55.1 U17.39 | length 161.8
  Top Layer w5: v2(3409.45,1681.1) 3411.42,1683.07 U17.39@3411.42,1744.09
  Bottom Layer w5: v2(3409.45,1681.1) R55.1@3409.45,1779.09
NetR58_2: R58.2 U18.1 | length 63.1
  Top Layer w5: R58.2@2586.61,909.26 2649.42,909.26 U18.1@2649.61,909.45
NetR60_2: R60.2 R61.1 U19.9 | length 261.8
  Top Layer w10: R61.1@2015.31,570.87 2015.31,500.44 R60.2@2023.62,492.13
  Top Layer w20: R60.2@2023.62,492.13 2023.62,468.5 2086.61,405.51 U19.9@2153.54,405.51
NetR61_2: R61.2 U19.8 | length 190.4
  Top Layer w10: R61.2@2055.31,570.87 2078.74,547.43 2078.74,476.38 2106.3,448.82 U19.8@2153.54,448.82
NetR62_2: R62.2 U19.7 | length 119.5
  Top Layer w10: R62.2@2055.31,622.05 2055.31,617.92 2106.3,566.93 U19.7@2149.61,566.93
NetR63_1: R63.1 U19.22 | length 122.1
  Top Layer w5: R63.1@2739.72,692.91 R63.1@2740.16,692.47
  Top Layer w15: U19.22@2637.8,740.16 2681.1,740.16 2728.35,692.91 R63.1@2739.72,692.91
NetR65_2: R65.2 U20.5 | length 311.2
  Top Layer w10: v2(1055.12,574.8) 1055.31,574.61 R65.2@1055.31,543.31 ; v2(1216.54,460.63) 1287.2,460.63 U20.5@1287.4,460.83
  Bottom Layer w10: v2(1055.12,574.8) 1169.29,460.63 v2(1216.54,460.63)
NetR67_1: R67.1 U20.8 | length 63
  Top Layer w10: R67.1@1286.96,248.03 1287.4,248.47 U20.8@1287.4,310.83
NetR69_2: R69.2 U22.5 | length 391.1
  Top Layer w10: R69.2@1055.31,913.39 1055.31,952.94 1070.87,968.5 1188.98,968.5 1208.66,948.82 1208.66,850.39 1224.21,834.84 U22.5@1287.4,834.84
NetR71_1: R71.1 U22.8 | length 63
  Top Layer w10: R71.1@1286.96,622.05 1286.96,684.4 U22.8@1287.4,684.84
NetU10_2: U10.2 U11.4 | length 234.6
  Top Layer w5: U11.4@2488.19,2716.54 2511.81,2716.54 2527.56,2732.28 2527.56,2803.15 2547.24,2822.83 2582.68,2822.83 2600.39,2840.54 U10.2@2600.39,2870.08
NetU12_2: U12.2 U14.5 | length 87
  Top Layer w5: U14.5@2716.54,2755.91 2716.54,2719.63 2746.06,2690.11 U12.2@2746.06,2681.1
NetU13_4: U13.4 U14.7 | length 222
  Top Layer w5: U13.4@2637.8,2716.54 2661.42,2740.16 2661.42,2783.46 2681.1,2803.15 2748.03,2803.15 2755.91,2795.28 U14.7@2755.91,2755.91
NetU20_4: U20.4 U21.2 | length 95.4
  Top Layer w5: U20.4@1492.13,460.83 U21.2@1584.44,460.83 ; U21.2@1584.44,464.32 U21.2@1586.61,462.15
NetU22_4: U22.4 U23.2 | length 95.2
  Top Layer w5: U22.4@1492.13,834.84 1584.85,834.84 U23.2@1586.61,836.61
OTG-SH-GND: C78.2 J7.6 J7.7 J7.8 J7.9 R74.1
OTG_N: D17.4 J7.2 M1.1 | length 1030.6
  Top Layer w5.3: M1.1@3882.48,2306.1 3882.48,2349.11 3862.2,2369.38 3862.2,2535.43 3971.88,2645.11 4373.9,2645.11 4385.15,2633.86 J7.2@4437.01,2633.86
  Top Layer w20: J7.2@4437.01,2633.86 4519.69,2633.86 v1(4523.62,2629.92)
  Bottom Layer w20: D17.4@4476.38,2590.55 4476.38,2618.11 4488.19,2629.92 v1(4523.62,2629.92)
OTG_P: D17.3 J7.3 M1.3 | length 1038.7
  Top Layer w5.3: M1.3@3832.48,2306.1 3832.48,2349.11 3853.2,2369.83 3853.2,2539.16 3968.15,2654.11 4373.9,2654.11 4385.15,2665.35 J7.3@4437.01,2665.35
  Top Layer w20: J7.3@4437.01,2665.35 4515.75,2665.35 v1(4523.62,2673.23)
  Bottom Layer w20: D17.3@4476.38,2708.66 4476.38,2692.91 4496.06,2673.23 v1(4523.62,2673.23)
OTGVBUS: C76.2 L9.1 Q8.2 R72.2 | length 804.7
  Top Layer w10: Q8.2@3666.46,2562.99 3666.46,2602.35 R72.2@3683.48,2619.37
  Top Layer w20: v1(3622.05,2562.99) Q8.2@3666.46,2562.99 ; v1(4169.29,2562.99) L9.1@4240.16,2562.99
  Top Layer w25: C76.2@4240.16,2484.25 L9.1@4240.16,2562.99
  Bottom Layer w20: v1(3622.05,2562.99) v1(4169.29,2562.99)
P2V8-OUT: M1.47 R23.1 R40.1 U4.6 U5.6 U10.1 | length 3310.5
  Top Layer w5: U10.1@2625.98,2870.08 2625.98,2921.7 R40.1@2622.49,2925.2 v2(2673.23,2925.2)
  Top Layer w10: U5.6@1610.24,3102.36 1641.73,3102.36 1661.42,3082.68 v2(1661.42,3066.93) ; U4.6@1610.24,4181.1 1645.67,4181.1 1661.42,4165.35 v2(1661.42,4137.8) ; R23.1@2732.28,2440.5 2732.48,2440.31 M1.47@2732.48,2306.1
  Bottom Layer w10: v2(1661.42,4137.8) 1661.42,3751.97 1720.47,3692.91 1720.47,3578.74 1661.42,3519.69 v2(1661.42,3066.93) 1716.54,3011.81 1909.45,3011.81 1948.82,3051.18 2625.98,3051.18 2673.23,3003.94 v2(2673.23,2925.2) 2673.23,2783.46 2807.09,2649.61 2807.09,2429.13 2775.59,2397.64 v2(2732.28,2397.64)
P3V3: C28.1 C67.1 C73.1 L5.2 M1.53 M1.54 M1.55 M1.56 Q9.2 R20.1 R30.1 R33.1 R57.1 R73.2 R75.1 R76.1 R77.1 R78.1 U7.5 U8.5 U18.4 U21.5 U23.5 | length 823.4
  Top Layer w10: U21.5@1671.61,487.75 1720.91,487.75 C67.1@1724.41,484.25 v2(1724.41,523.62) ; U23.5@1671.61,862.2 C73.1@1720.91,862.2 ; C73.1@1724.41,858.71 v2(1724.41,893.7) ; R20.1@1748.47,4192.91 v2(1787.4,4192.91) ; v2(3437.01,2452.76) U7.5@3437.01,2540.98 ; v2(3562.99,2452.76) U8.5@3562.99,2540.98 ; R73.2@3724.6,2814.96 3724.6,2799.02 3742.72,2780.9 Q9.2@3742.72,2761.1 3784.72,2761.1 v2(3785.98,2759.84)
  Top Layer w15: v2(4318.9,3141.73) R75.1@4357.83,3141.73 ; v2(4318.9,3362.2) R76.1@4357.83,3362.2 ; v2(4318.9,3582.68) R77.1@4357.83,3582.68 ; v2(4318.9,3803.15) R78.1@4357.83,3803.15
  Top Layer w30: v1(2728.35,1129.92) U18.4@2728.35,1027.56 v1(2795.28,1027.56)
  other v1: 2761.81,1027.56 2535.43,2236.22 2582.68,2236.22 2535.43,2389.76 2578.74,2389.76 2535.43,2429.13 2578.74,2429.13 2535.43,2468.5 2578.74,2468.5 1161.42,3885.83 1228.35,3885.83 1291.34,3885.83 1358.27,3885.83 1421.26,3885.83 1484.25,3885.83
P3V8: C51.2 R45.1 R47.2 U15.4 U16.4 | length 158
  Top Layer w5: 2633.86,1177.17 2728.35,1177.17 2740.16,1188.98 R45.1@2740.16,1235.78
P5V0: C35.1 C50.2 C65.1 C66.1 C71.1 C72.1 L7.2 M1.8 Q6.2 R26.1 R51.2 U15.1 U15.2 U20.3 U21.1 U22.3 U23.1 | length 3058.2
  Top Layer w10: U23.1@1586.61,862.2 1586.61,972.44 1590.55,976.38 ; R26.1@1748.47,3114.17 v2(1783.46,3114.17)
  Top Layer w15: v2(1393.7,444.88) 1417.32,444.88 ; v2(1393.7,818.9) 1415.35,818.9 1417.32,820.87 ; 1417.32,543.31 1420.82,546.8 C66.1@1590.11,546.8 1586.61,543.31 U21.1@1586.61,487.75
  Top Layer w20: U20.3@1492.13,410.83 1427.76,410.83 1417.32,421.26 1417.32,444.88 1417.32,543.31 1417.32,783.46 ; U22.3@1492.13,784.84 1418.7,784.84 1417.32,783.46 ; 1988.19,1177.17 1787.4,976.38 1590.55,976.38 1535.43,976.38 1417.32,858.27 1417.32,820.87 1417.32,783.46 ; v1(2547.24,1736.22) 2547.43,1736.03 R51.2@2594.49,1736.03 2614.36,1736.03 2630.12,1720.28 Q6.2@2653.54,1720.28 ; v1(3732.28,2232.28) 3732.48,2232.09 M1.8@3732.48,2158.47
  Bottom Layer w15: C65.1@1393.7,405.95 v2(1393.7,444.88) ; C71.1@1393.7,779.97 v2(1393.7,818.9)
  Bottom Layer w20: v1(2740.16,2055.12) 2874.02,2055.12 2988.19,2169.29 3669.29,2169.29 v1(3732.28,2232.28)
  other v1: 2031.5,1224.41 2074.8,1224.41 2118.11,1224.41 2161.42,1224.41 2204.72,1224.41 2031.5,1275.59 2074.8,1275.59 2118.11,1275.59 2161.42,1275.59 2204.72,1275.59 1279.53,2787.4 1334.65,2787.4 1389.76,2787.4 1444.88,2787.4 1500,2787.4 1555.12,2787.4
P8V0: C19.1 D5.1 L4.2 R4.2 | length 128.7
  Top Layer w10: R4.2@767.72,2405.7 767.72,2448.82 803.15,2484.25 838.58,2484.25
  other v1: 885.83,2566.93 937.01,2566.93 988.19,2566.93 1039.37,2566.93 885.83,2610.24 937.01,2610.24 988.19,2610.24 1039.37,2610.24
P8V5: C27.2 C29.2 C30.1 D7.1 L6.2 R17.2 R27.1 | length 650.4
  Top Layer w10: R17.2@1393.7,2406.14 1393.7,2464.57 1417.32,2488.19 1472.44,2488.19 ; 1688.98,2637.8 1732.28,2681.1 1964.57,2681.1 ; 1898.08,2680.66 R27.1@2107.98,2680.66
  other v1: 1570.87,2421.26 1500,2570.87 1547.24,2570.87 1594.49,2570.87 1641.73,2570.87 1500,2614.17 1547.24,2614.17 1594.49,2614.17 1641.73,2614.17
PGND: C1.2 C2.2 C5.2 D3.1 J8.2 L2.2 R2.2
  other v1: 874.02,1149.61 917.32,1149.61 960.63,1149.61 874.02,1196.85 917.32,1196.85 960.63,1196.85 874.02,1244.09 917.32,1244.09 960.63,1244.09 874.02,1291.34 917.32,1291.34 960.63,1291.34
PMIC-ON-REQ: M1.14 R41.1 U12.1 | length 1624.1
  Top Layer w5: U12.1@2771.65,2681.1 2795.28,2681.1 2818.46,2657.92 R41.1@2838.58,2657.92 2881.45,2657.92 v2(2881.89,2657.48) ; M1.14@3582.48,2158.47 3582.48,2090.75 v2(3582.68,2090.55)
  Bottom Layer w5: v2(2881.89,2657.48) 2921.26,2618.11 3468.5,2618.11 3811.02,2275.59 3811.02,2200.79 3700.79,2090.55 v2(3582.68,2090.55)
PMIC-PWRON: M1.16 R41.2 U12.4 | length 1665.9
  Top Layer w5: U12.4@2720.46,2596.1 2720.46,2625.97 2732.28,2637.8 2787.4,2637.8 2807.28,2617.92 R41.2@2838.58,2617.92 2838.77,2618.11 v2(2881.89,2618.11) ; v2(3531.5,2090.55) 3532.48,2091.53 M1.16@3532.48,2158.47
  Bottom Layer w5: v2(2881.89,2618.11) 2897.64,2602.36 3460.63,2602.36 3755.91,2307.09 3755.91,2177.17 3688.98,2110.24 3551.18,2110.24 v2(3531.5,2090.55)
PWR-STATUS: M1.19 R30.2 U7.4 | length 254.2
  Top Layer w5: U7.4@3385.81,2540.98 3385.81,2515.76 3393.51,2508.06 R30.2@3393.51,2488.19 3393.51,2445.07 3432.48,2406.1 M1.19@3432.48,2306.1
PWRIN: F1.2 J8.1